# Altium PCB BK Robot.PcbDoc (part 2 of 2)
Units mil, origin at the board's own origin, x right, y up, seen from the top; angles counter-clockwise.
Board outline 3937.01 x 3937.01 mil, 2 copper layers (Top Layer, Bottom Layer); 189 components, 168 nets, 636 pads, 401 vias.
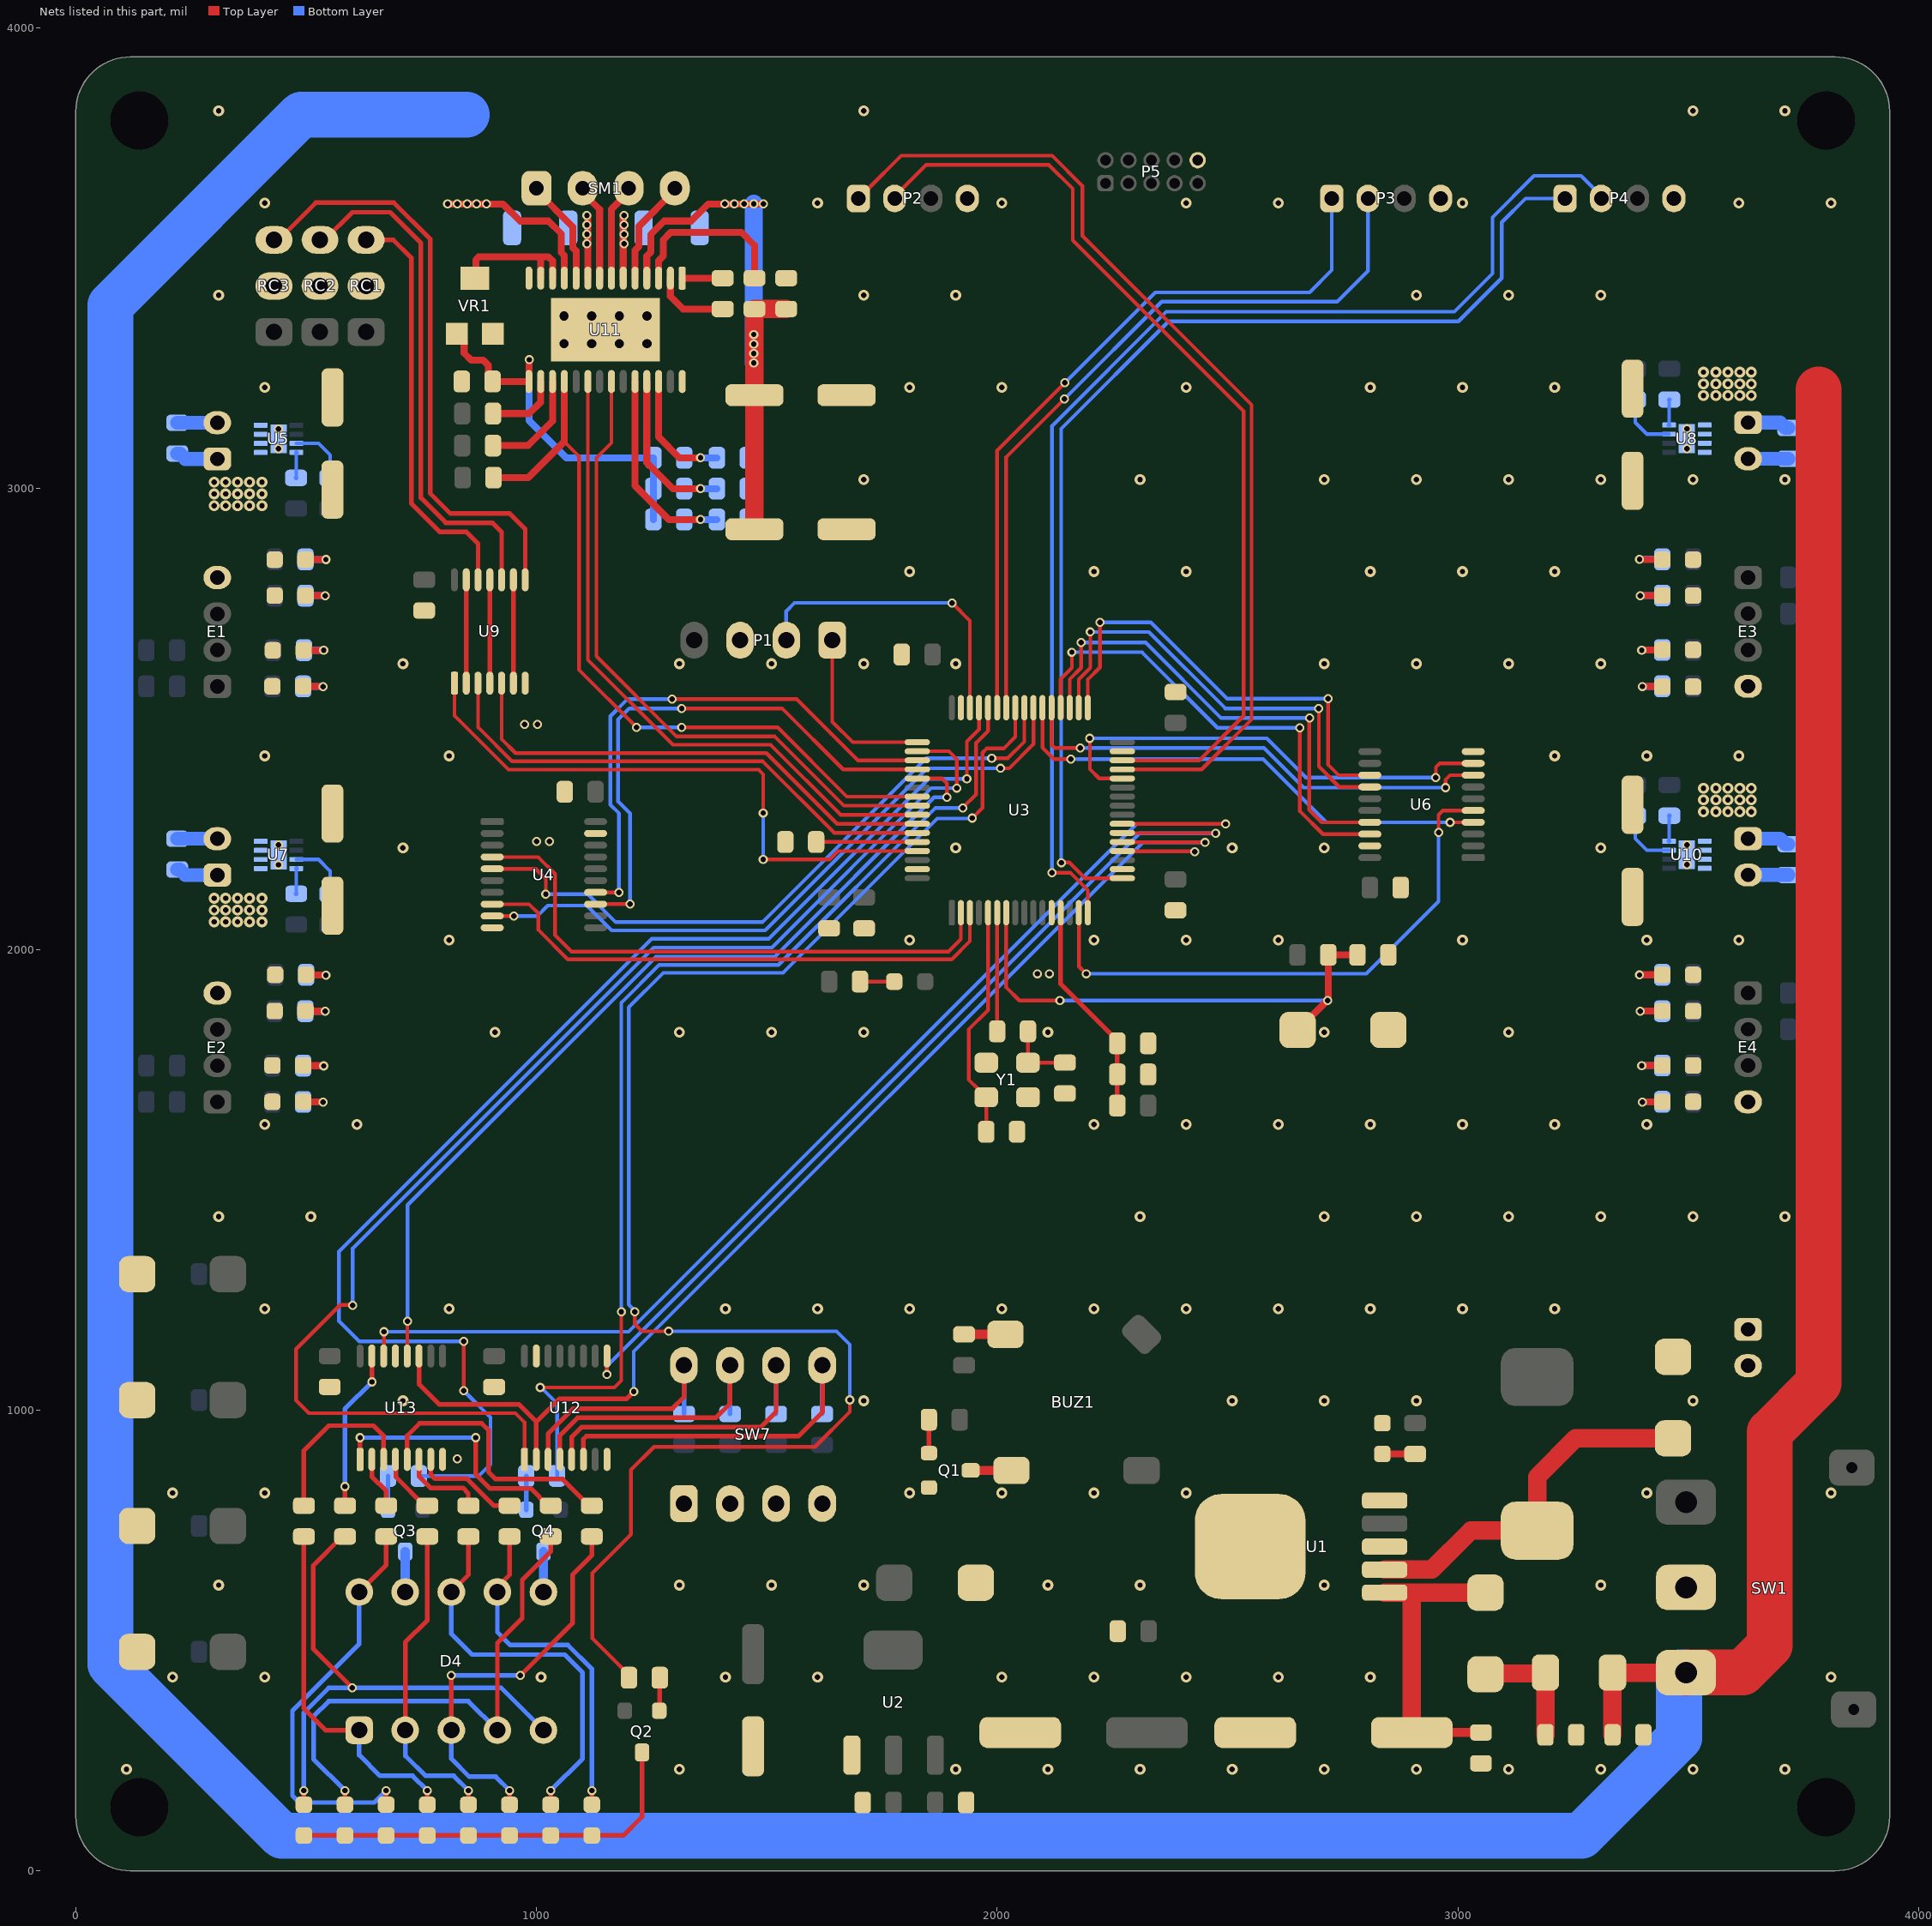
[diagram p2: the nets of this part, all layers, seen from the top]

## Via types
v1: diameter 23.62, hole 11.81, Top Layer to Bottom Layer, tented both sides, 208 vias
v2: diameter 19.68, hole 11.81, Top Layer to Bottom Layer, tented both sides, 167 vias
v3: diameter 19.68, hole 11.81, Top Layer to Bottom Layer, tented bottom, 18 vias
v4: diameter 40, hole 20, Top Layer to Bottom Layer, tented both sides, 8 vias

## Nets (pads, with @x,y where several pads share a name; then routed paths per layer and width w, separated by ;. In a path a pad name is that pad's centre, name@x,y a point inside that pad or via, vN(x,y) a via of type N, cw(c..) or ccw(c..) an arc to the next point about the centre after c; other vN are vias at no path point) (continued)
ENCODER2_A: U3.51 U4.14 | length 1177.8
  Top Layer w8: U4.14@1128.2,2123.61 v2(1178.99,2123.63) ; v2(1294,2543) 1565,2543 1697.73,2410.27 U3.51@1826.5,2410.27
  Bottom Layer w8: v2(1178.99,2123.63) 1178.99,2295.01 1160,2314 1160,2506 1197,2543 v2(1294,2543)
ENCODER2_B: U3.52 U4.13 | length 1198.5
  Top Layer w8: U4.13@1128.2,2098.02 1128.5,2098.32 1200.68,2098.32 v2@1200.99,2098.63 ; v2(1315,2523) 1533,2523 1665.42,2390.58 U3.52@1826.5,2390.58
  Bottom Layer w8: v2(1202.99,2098.63) 1202.99,2295.01 1177,2321 1177,2499 1201,2523 v2(1315,2523)
ENCODER3_A: U3.34 U6.14 | length 984.9
  Top Layer w8: U3.34@2176.95,2524.5 2176.95,2585.95 2202,2611 v2@2202,2685 ; v2@2698,2517 2698,2397 2742.54,2352.46 U6.14@2808.78,2352.46
  Bottom Layer w8: v2(2202,2689) 2329,2689 2495,2523 v2(2698,2523)
ENCODER3_B: U3.33 U6.13 | length 989.5
  Top Layer w8: U3.33@2196.64,2524.5 2196.64,2585.84 2223,2612.2 v2@2223,2706 ; 2718,2534 2718,2401 2740.95,2378.05 U6.13@2808.78,2378.05
  Bottom Layer w8: v2(2223,2710) 2333,2710 2499,2544 v2(2718,2544)
ENCODER4_A: U3.36 U6.18 | length 1047
  Top Layer w8: U3.36@2137.58,2524.5 2137.58,2586.58 2162,2611 v2(2162,2645) ; v2(2657,2481) 2657,2300 2706.9,2250.1 U6.18@2808.78,2250.1
  Bottom Layer w8: v2(2162,2645) 2314,2645 2478,2481 v2(2657,2481)
ENCODER4_B: U3.35 U6.17 | length 1054.2
  Top Layer w8: U3.35@2157.27,2524.5 2157.27,2586.27 2182,2611 v2(2182,2666) ; v2@2678,2498 2677,2497 2677,2303 2704.31,2275.69 U6.17@2808.78,2275.69
  Bottom Layer w8: v2(2182,2666) 2322,2666 2486,2502 v2(2678,2502)
GND: C1.2 C2.2 C3.2 C4.2 C5.2 C6.2 C7.2 C8.2 C9.2 C10.2 C11.2 C12.2 C13.2 C14.2 C15.2 C16.2 C17.2 C18.2 C19.2 C21.2 C22.2 C24.2 C25.2 C27.2 C29.2 C30.2 C32.2 C33.2 C34.1 C36.2 C37.2 C38.2 D2.1 D3.1 E1.4 E2.4 E3.4 E4.4 JP1.1 LED1.2 LED2.2 LED3.2 LED4.2 LED5.2 LED6.2 LED7.2 LED8.2 LED9.2 LED10.2 LED11.2 LED12.2 LED13.2 LED14.2 LED15.2 LED16.2 LED17.2 P1.3 P2.4 P3.4 P4.4 P5.10 Q1.2 R2.1 R39.1 R43.1 R45.1 R46.2 R47.2 RC1.2 RC2.2 RC3.2 SW2.2 SW3.1 SW4.1 SW5.1 SW6.1 SW7.1 SW7.2 SW7.3 SW7.4 U1.3 U1.5 U1.6 U2.1 U3.12 U3.18 U3.31 U3.47 U3.63 U4.10 U4.19 U5.4 U5.9 U5.10 U5.11 U6.10 U6.19 U7.4 U7.9 U7.10 U7.11 U8.4 U8.9 U8.10 U8.11 U9.7 U10.4 U10.9 U10.10 U10.11 U11.14 U11.28 U11.29 U12.8 U12.15 U13.8 U13.13 VR1.3 Y1.2 Y1.4
  other v1: 110,220 1310,220 1910,220 2110,220 2310,220 2510,220 2710,220 2910,220 3110,220 3310,220 3510,220 3710,220 210,420 410,420 1010,420 1410,420 1610,420 2010,420 2210,420 2410,420 2610,420 2810,420 3810,420 310,620 1310,620 1510,620 1710,620 2110,620 2310,620 2710,620 3310,620 210,820 410,820 1810,820 2010,820 2210,820 2410,820 3410,820 3810,820 710,1020 1710,1020 2510,1020 2710,1020 2910,1020 3510,1020 410,1220 810,1220 1410,1220 1610,1220 1810,1220 2010,1220 2210,1220 2410,1220 2610,1220 2810,1220 3010,1220 3210,1220 310,1420 510,1420 2310,1420 2710,1420 2910,1420 3110,1420 3310,1420 3510,1420 3710,1420 410,1620 610,1620 2210,1620 2410,1620 2610,1620 2810,1620 3010,1620 3210,1620 3410,1620 910,1820 1310,1820 1510,1820 1710,1820 2110,1820 2710,1820 3110,1820 810,2020 1810,2020 2210,2020 2410,2020 2610,2020 3010,2020 3410,2020 3610,2020 710,2220 1910,2220 2510,2220 2710,2220 3310,2220 410,2420 810,2420 3210,2420 3410,2420 3610,2420 710,2620 1310,2620 1510,2620 1710,2620 1910,2620 2710,2620 2910,2620 3110,2620 3310,2620 1810,2820 2210,2820 2410,2820 2810,2820 3010,2820 3210,2820 1710,3020 2310,3020 2710,3020 2910,3020 3110,3020 3310,3020 3510,3020 3710,3020 410,3220 1810,3220 2010,3220 2410,3220 2810,3220 3010,3220 3210,3220 310,3420 1710,3420 1910,3420 2910,3420 3110,3420 3310,3420 410,3620 1610,3620 2010,3620 2410,3620 2610,3620 3010,3620 3610,3620 3810,3620 310,3820 1710,3820 3510,3820 3710,3820
  other v2: 828,894 2087,1947 2113,1947 1000,2234 1028,2234 974,2488 1002,2488
  other v4: 1059.75,3314.8 1119.75,3314.8 1179.75,3314.8 1239.75,3314.8 1059.75,3374.8 1119.75,3374.8 1179.75,3374.8 1239.75,3374.8
I2C2_SCL: P2.1 U3.29 | length 2187.7
  Top Layer w8: P2.1@1698.78,3630 1698.78,3630.4 1719.13,3650.75 1719.53,3650.75 1791.78,3723 2119,3723 2185,3657 2185,3549 2552,3182 2552,2499 2443.58,2390.58 U3.29@2271.5,2390.58
I2C2_SDA: P2.2 U3.30 | length 2042.4
  Top Layer w8: P2.2@1777.52,3630 1777.52,3635 1845.52,3703 2112,3703 2164,3651 2164,3539 2535,3168 2535,2507 2438.27,2410.27 U3.30@2271.5,2410.27
INPUT_LOAD: U3.50 U12.1 | length 2874.7
  Top Layer w8: v2(601,1227) 600,1228 573.87,1228 478,1132.13 478,1021 506,993 954.13,993 973.84,973.29 U12.1@973.84,892.8 ; U3.50@1826.5,2429.95 1895.05,2429.95 1912,2413 v2(1912,2350)
  Bottom Layer w8: v2(601,1227) 601,1351 1254,2004 1511,2004 1857,2350 v2(1912,2350)
LED7_A: D4.7 LED19.2 R60.2 | length 751.2
  Top Layer w10: D4.7@915,605 915,615.78 941.43,642.21 R60.2@941.43,725.54 ; LED19.2@1120,143.46 v2(1120,174)
  Bottom Layer w10: D4.7@915,605 915,518 943,490 1068,490 1120,438 v2(1120,174)
LED7_B: D4.8 LED20.2 R61.2 | length 861.8
  Top Layer w10: D4.8@815,605 852.14,642.14 R61.2@852.14,725.54 ; LED20.2@1030.71,143.46 v2(1030.71,174)
  Bottom Layer w10: D4.8@815,605 815,514 860,469 1060.72,469 1100,429.72 1100,243.29 v2(1030.71,174)
LED7_C: D4.3 LED21.2 R64.2 | length 882.3
  Top Layer w10: D4.3@815,305 v2(815,424) ; LED21.2@941.43,143.46 v2(941.43,174) ; v2(965,424) 1078,537 1078,642 1120,684 R64.2@1120,725.54
  Bottom Layer w10: D4.3@815,305 815,243 854,204 911.43,204 v2(941.43,174) ; v2(815,424) v2(965,424)
LED7_D: D4.2 LED22.2 R65.2 | length 695.1
  Top Layer w10: D4.2@715,305 715,496 762.86,543.86 R65.2@762.86,725.54 ; LED22.2@852.14,143.46 v2(852.14,174)
  Bottom Layer w10: D4.2@715,305 715,249 716.14,249 759.14,206 820.14,206 v2(852.14,174)
LED7_E: D4.1 LED23.2 R66.2 | length 777.3
  Top Layer w10: R66.2@495,725.54 495,352 542,305 D4.1@615,305 ; LED23.2@762.86,143.46 v2(762.86,174)
  Bottom Layer w10: D4.1@615,305 615,251 660,206 730.86,206 v2(762.86,174)
LED7_EN1: R62.2 U3.45 | length 2850.5
  Top Layer w8: v2(842,1042) v2(842,1149) ; v2(1934,2370) 1934,2451 1960.42,2477.42 U3.45@1960.42,2524.5
  Bottom Layer w8: R62.2@744.53,857 875,857 900,882 900,984 v2(842,1042) ; v2(842,1149) 615,1149 571,1193 571,1344 1250,2023 1504,2023 1851,2370 v2(1934,2370)
LED7_EN2: R63.2 U3.44 | length 2367.1
  Top Layer w8: v2(1008,1049) 1169,1049 1184,1064 v2(1184,1213) ; v2(1925,2307) 1954,2336 1954,2448 1980.1,2474.1 U3.44@1980.1,2524.5
  Bottom Layer w8: v2(1008,1049) 1010,1049 1044.53,1014.47 R63.2@1044.53,857 ; v2(1184,1213) 1184,1884 1266,1966 1525,1966 1866,2307 v2(1925,2307)
LED7_F: D4.10 LED24.2 R67.2 | length 897.9
  Top Layer w10: D4.10@615,605 673.57,663.57 R67.2@673.57,725.54 ; LED24.2@673.57,143.46 v2(673.57,174)
  Bottom Layer w10: D4.10@615,605 615,492 470,347 470,163 485,148 647.57,148 v2(673.57,174)
LED7_G: D4.4 LED25.2 R68.2 | length 1127.1
  Top Layer w10: LED25.2@584.29,143.46 v2(584.29,174) ; D4.4@915,305 915,494 969,548 969,631 1030.71,692.71 R68.2@1030.71,725.54
  Bottom Layer w10: v2(584.29,174) 516,242.29 516,335 549,368 852,368 D4.4@915,305
LED7_P: D4.5 LED26.2 R69.2 | length 1175.9
  Top Layer w10: LED26.2@495,143.46 v2(495,174) ; R69.2@584.29,725.54 578.38,725.54 515,662.16 515,482 v2(600,397)
  Bottom Layer w10: v2(495,174) 495,343 549,397 v2(600,397) 923,397 D4.5@1015,305
LED_EN: R59.2 U3.41 | length 3586
  Top Layer w8: R59.2@1200.54,419 1200.54,424.91 1121,504.44 1121,646 1205,730 1205,870 1255,920 1604,920 1680,996 v2(1680,1022) ; v2(1213,1213) 1213,1187 1229,1171 v2(1287,1171) ; v2(1946,2285) 1968,2307 1968,2427 1977,2436 2014,2436 2039.16,2461.16 U3.41@2039.16,2524.5
  Bottom Layer w8: v2(1213,1213) 1213,1216.16 1200,1229.16 1200,1874 1275,1949 1535,1949 1870,2284 1945,2284 v2(1946,2285) ; v2(1287,1171) 1651,1171 1680,1142 v2(1680,1022)
LED_LATCH: U3.53 U13.12 | length 1964.9
  Top Layer w8: U13.12@718.96,1116.96 U13.12@719.2,1117.2 719.45,1117.45 v2@719.45,1192.76 ; U3.53@1826.5,2370.9 1880.1,2370.9 1891,2360 v2(1891,2330)
  Bottom Layer w8: v2(719.94,1192.76) 719.94,1444.94 1259,1984 1517,1984 1863,2330 v2(1891,2330)
M1_DIR: U3.2 U4.4 | length 1248.9
  Top Layer w8: U4.4@903.8,2200.39 1003.61,2200.39 1040,2164 1040,2031 1076,1995 1894,1995 1921.05,2022.05 U3.2@1921.05,2079.5
M1_L: C20.2 M1.1 U5.2 | length 91.9
  Bottom Layer w30: C20.2@220,3076.26 225.91,3076.26 237.72,3064.45 M1.1@306.98,3064.45
M1_PWM: U3.40 U4.5 | length 1465.3
  Top Layer w8: U4.5@903.8,2174.8 998.2,2174.8 1020,2153 v2(1020,2120) v2@1020,2113 ; v2(1988,2415) 2023,2415 2058.84,2450.84 U3.40@2058.84,2524.5
  Bottom Layer w8: v2(1020,2120) 1111,2120 1172,2059 1490,2059 1846,2415 v2(1988,2415)
M1_R: C20.1 M1.2 U5.3 | length 87
  Bottom Layer w30: C20.1@220,3143.19 M1.2@306.98,3143.19
M2_DIR: U3.3 U4.8 | length 1186
  Top Layer w8: U4.8@903.8,2098.02 983.98,2098.02 1004,2078 1004,2042 1068,1978 1901,1978 1940.73,2017.73 U3.3@1940.73,2079.5
M2_L: C23.2 M2.1 U7.2 | length 91.9
  Bottom Layer w30: C23.2@220,2173.07 225.91,2173.07 237.72,2161.26 M2.1@306.98,2161.26
M2_PWM: U3.39 U4.9 | length 1453.3
  Top Layer w8: U4.9@903.8,2072.43 904.01,2072.22 950.78,2072.22 v2(951,2072) ; v2(2007,2393) 2026,2393 2078.53,2445.53 U3.39@2078.53,2524.5
  Bottom Layer w8: v2(951,2072) 1001.2,2072 1024.2,2095 1109,2095 1163,2041 1496,2041 1848,2393 v2(2007,2393)
M2_R: C23.1 M2.2 U7.3 | length 87
  Bottom Layer w30: C23.1@220,2240 M2.2@306.98,2240
M3_DIR: U3.28 U6.9 | length 1038.8
  Top Layer w8: v2(2201,2458) 2201,2391 2221.1,2370.9 U3.28@2271.5,2370.9 ; v2(2952,2373) 2952.44,2373.44 2952.44,2395.44 2960.65,2403.65 U6.9@3033.19,2403.65
  Bottom Layer w8: v2(2201,2458) 2585,2458 2670,2373 v2(2952,2373)
M3_L: C26.2 M3.1 U8.2 | length 91.9
  Bottom Layer w30: M3.1@3630,3143.49 3699.26,3143.49 3711.08,3131.68 C26.2@3716.98,3131.68
M3_PWM: U3.37 U6.8 | length 1042.4
  Top Layer w8: U3.37@2117.9,2524.5 2117.9,2444.1 2125,2437 v2(2180,2437) ; v2(2973,2351) 2973,2368 2983.03,2378.03 U6.8@3033.16,2378.03
  Bottom Layer w8: 2193,2437 2579,2437 2665,2351 v2(2973,2351)
M3_R: C26.1 M3.2 U8.3 | length 87
  Bottom Layer w30: M3.2@3630,3064.75 C26.1@3716.98,3064.75
M4_DIR: U3.15 U6.5 | length 1238.4
  Top Layer w8: U3.15@2176.95,2079.5 2177.48,2078.97 2177.48,1962.52 v2(2193,1947) ; v2(2958,2254) 2958,2292 2967.28,2301.28 U6.5@3033.19,2301.28 U6.5@3033.33,2301.14
  Bottom Layer w8: v2(2193,1947) 2801,1947 2958,2104 v2(2958,2254) v2@2958,2256
M4_L: C28.2 M4.1 U10.2 | length 91.9
  Bottom Layer w30: M4.1@3630,2240.3 3699.26,2240.3 3711.08,2228.49 C28.2@3716.98,2228.49
M4_PWM: U3.38 U6.4 | length 1075.8
  Top Layer w8: U3.38@2098.21,2524.5 2098.21,2437.79 2123,2413 v2(2160,2413) ; v2@2983.03,2275.67 U6.4@3033.19,2275.69
  Bottom Layer w8: 2173,2413 2577,2413 2714.36,2275.64 v2(2983,2275.64)
M4_R: C28.1 M4.2 U10.3 | length 87
  Bottom Layer w30: M4.2@3630,2161.56 C28.1@3716.98,2161.56
NetBUZ1_1: BUZ1.1 R48.1 | length 90
  Top Layer w20: R48.1@1928,1164.28 BUZ1.1@2018,1164.28
NetBUZ1_2: BUZ1.2 Q1.3 | length 88.7
  Top Layer w20: Q1.3@1942.28,869 BUZ1.2@2031,869
NetC2_1: C2.1 D1.1 L1.2 | length 266.4
  Top Layer w40: D1.1@3060,426.42 3061.75,428.17 3188.25,428.17 L1.2@3190,429.92 C2.1@3190,295
NetC3_1: C3.1 C4.1 D1.2 U1.1 | length 673.5
  Top Layer w20: C3.1@2900,300 C4.1@3050,300
  Top Layer w40: U1.1@2840.89,603.58 2898,603.58 ; C3.1@2900,300 2900,601.58 2898,603.58 ; D1.2@3060,603.58 2898,603.58
NetC10_1: C10.1 R3.1 Y1.1 | length 148.3
  Top Layer w8: R3.1@2066.72,1822 Y1.1@2066.72,1754 C10.1@2147,1754
NetC11_1: C11.1 U3.5 Y1.3 | length 508.9
  Top Layer w8: C11.1@1976.17,1604 Y1.3@1976.17,1679.2 1975.92,1679.2 1958.79,1696.33 1958.79,1696.57 1938,1717.36 1938,1826 1980.1,1868.1 U3.5@1980.1,2079.5
NetC12_1: C12.1 R4.2 SW2.1 U3.7 | length 1125.4
  Top Layer w8: U3.7@2019.47,2079.5 2019.47,1917.53 2048,1889 v2(2136,1889)
  Top Layer w15: SW2.1@2652.15,1825 2718.46,1891.32 R4.2@2718.46,1988 C12.1@2782.07,1988
  Bottom Layer w8: v2(2136,1889) v2(2717,1889)
NetC18_1: C18.1 C19.1 L3.1 U3.13 | length 469.4
  Top Layer w10: U3.13@2137.58,2079.5 2137.58,1924.86 2260.54,1801.91 C18.1@2260.54,1796 C19.1@2260.54,1728.5 L3.1@2260.54,1661
NetC31_1: C31.1 U11.2 | length 164.4
  Top Layer w15: U11.2@1290.5,3457 1290.5,3417.5 1317.93,3390.07 C31.1@1404,3390.07
NetC31_2: C31.2 U11.1 | length 87.9
  Top Layer w15: U11.1@1316.09,3457 C31.2@1404,3457
NetC35_2: C35.2 U11.3 | length 374.4
  Top Layer w15: U11.3@1264.91,3457 1264.91,3495.1 1275,3505.19 1275,3540 1291,3556 1445,3556 1473,3528 C35.2@1473,3457
NetD2_2: D2.2 L2.1 U1.2 | length 812.5
  Top Layer w40: U1.2@2840.89,653.58 2943.58,653.58 3028.15,738.15 L2.1@3172,738.15 3172,855 3255.42,938.42 D2.2@3467,938.42
NetD4_6: D4.6 Q4.3 | length 87.7
  Bottom Layer w20: D4.6@1015,605 Q4.3@1015,692.72
NetD4_9: D4.9 Q3.3 | length 87.7
  Bottom Layer w20: D4.9@715,605 Q3.3@715,692.72
NetJP1_2: JP1.2 SW1.2
NetLED1_1: LED1.1 R1.1 | length 71
  Top Layer w15: LED1.1@2836,904.54 R1.1@2907,904.54
NetLED2_1: LED2.1 R11.1 | length 87.5
  Top Layer w15: LED2.1@498.46,2846 498.52,2846.06 v2(542.74,2846.12) v2(542.74,2846.12)
  Bottom Layer w15: R11.1@499.74,2846.64 500,2846.38 542.48,2846.38 v2(542.74,2846.12)
NetLED3_1: LED3.1 R12.1 | length 86.2
  Top Layer w15: LED3.1@498.46,2768 498.78,2767.69 540.89,2767.69 v2(541.2,2767.38)
  Bottom Layer w15: R12.1@498.2,2767.9 R12.1@498.46,2767.64 540.94,2767.64 v2(541.2,2767.38)
NetLED4_1: LED4.1 R13.1 | length 86.8
  Top Layer w15: LED4.1@494.46,2649 v2(538,2649)
  Bottom Layer w15: R13.1@495,2649.52 495.26,2649.26 537.74,2649.26 v2(538,2649)
NetLED5_1: LED5.1 R14.1 | length 86.5
  Top Layer w15: LED5.1@493.46,2571 493.83,2570.63 536.09,2570.63 v2(536.46,2570.26)
  Bottom Layer w15: R14.1@493.46,2570.78 493.72,2570.52 536.2,2570.52 v2(536.46,2570.26)
NetLED6_1: LED6.1 R20.1 | length 86.9
  Top Layer w15: LED6.1@499.46,1945 499.91,1944.56 542.3,1944.56 v2(542.74,1944.12)
  Bottom Layer w15: R20.1@499.74,1944.64 500,1944.38 542.48,1944.38 v2(542.74,1944.12)
NetLED7_1: LED7.1 R21.1 | length 86.2
  Top Layer w15: LED7.1@498.46,1866 498.78,1865.69 540.89,1865.69 v2(541.2,1865.38)
  Bottom Layer w15: R21.1@498.2,1865.9 498.46,1865.64 540.94,1865.64 v2(541.2,1865.38)
NetLED8_1: LED8.1 R23.1 | length 88.2
  Top Layer w15: LED8.1@493.46,1748 493.96,1747.5 537.5,1747.5 v2(538,1747)
  Bottom Layer w15: R23.1@495,1747.52 495.26,1747.26 537.74,1747.26 v2(538,1747)
NetLED9_1: LED9.1 R24.1 | length 86.5
  Top Layer w15: LED9.1@493.46,1669 493.83,1668.63 536.09,1668.63 v2(536.46,1668.26)
  Bottom Layer w15: R24.1@493.46,1668.78 493.72,1668.52 536.2,1668.52 v2(536.46,1668.26)
NetLED10_1: LED10.1 R27.1 | length 92.7
  Top Layer w15: v2(3394.24,2846.42) 3394.45,2846.21 3443.33,2846.21 LED10.1@3443.54,2846
  Bottom Layer w15: v2(3394.24,2846.42) 3394.5,2846.68 3436.98,2846.68 R27.1@3437.24,2846.94
NetLED11_1: LED11.1 R28.1 | length 91.1
  Top Layer w15: v2(3395.78,2767.68) 3395.94,2767.84 3443.37,2767.84 LED11.1@3443.54,2768
  Bottom Layer w15: v2(3395.78,2767.68) 3396.04,2767.94 3438.52,2767.94 R28.1@3438.78,2768.2
NetLED12_1: LED12.1 R29.1 | length 88.1
  Top Layer w15: v2(3398.98,2649.3) 3399.33,2649.65 3443.19,2649.65 LED12.1@3443.54,2650
  Bottom Layer w15: v2(3398.98,2649.3) 3399.24,2649.56 3441.72,2649.56 R29.1@3441.98,2649.82
NetLED13_1: LED13.1 R30.1 | length 86.5
  Top Layer w15: v2(3400.52,2570.56) 3400.8,2570.28 3443.26,2570.28 LED13.1@3443.54,2570
  Bottom Layer w15: v2(3400.52,2570.56) 3400.78,2570.82 3443.26,2570.82 R30.1@3443.52,2571.08
NetLED14_1: LED14.1 R33.1 | length 92.8
  Top Layer w15: v2(3394.24,1944.42) 3394.53,1944.71 3443.24,1944.71 LED14.1@3443.54,1945
  Bottom Layer w15: v2(3394.24,1944.42) 3394.5,1944.68 3436.98,1944.68 R33.1@3437.24,1944.94
NetLED15_1: LED15.1 R34.1 | length 91.1
  Top Layer w15: v2(3395.78,1865.68) 3395.94,1865.84 3443.37,1865.84 LED15.1@3443.54,1866
  Bottom Layer w15: v2(3395.78,1865.68) 3396.04,1865.94 3438.52,1865.94 R34.1@3438.78,1866.2
NetLED16_1: LED16.1 R35.1 | length 88.1
  Top Layer w15: v2(3398.98,1747.3) 3399.33,1747.65 3443.19,1747.65 LED16.1@3443.54,1748
  Bottom Layer w15: v2(3398.98,1747.3) 3399.24,1747.56 3441.72,1747.56 R35.1@3441.98,1747.82
NetLED17_1: LED17.1 R36.1 | length 86.4
  Top Layer w15: v2(3400.52,1668.56) 3400.74,1668.78 3443.31,1668.78 LED17.1@3443.54,1669
  Bottom Layer w15: v2(3400.52,1668.56) 3400.78,1668.82 3443.26,1668.82 R36.1@3443.54,1669.08
NetLED18_1: LED18.1 R58.1 | length 74.6
  Top Layer w8: R58.1@1701.93,1930 LED18.1@1776.54,1930
NetLED19_1: LED19.1 LED20.1 LED21.1 LED22.1 LED23.1 LED24.1 LED25.1 LED26.1 Q2.3 | length 890.5
  Top Layer w10: LED26.1@495,76.54 LED25.1@584.29,76.54 LED24.1@673.57,76.54 LED23.1@762.86,76.54 LED22.1@852.14,76.54 LED21.1@941.43,76.54 LED20.1@1030.71,76.54 LED19.1@1120,76.54 1188.54,76.54 1229,117 Q2.3@1229,256.72
NetQ1_1: Q1.1 R55.2 | length 72.6
  Top Layer w10: Q1.1@1851.72,906.4 R55.2@1851.72,979
NetQ2_1: Q2.1 R59.1 | length 72.2
  Top Layer w10: Q2.1@1266.4,347.28 1266.93,347.81 1266.93,418.47 R59.1@1267.46,419
NetQ3_1: Q3.1 R62.1 | length 73.7
  Bottom Layer w10: Q3.1@677.6,783.28 R62.1@677.6,857
NetQ4_1: Q4.1 R63.1 | length 73.7
  Bottom Layer w10: Q4.1@977.6,783.28 R63.1@977.6,857
NetR2_2: R2.2 U3.60 | length 219.6
  Top Layer w8: R2.2@1606.93,2233.1 U3.60@1826.5,2233.1
NetR3_2: R3.2 U3.6 | length 257.5
  Top Layer w8: R3.2@1999.79,1822 U3.6@1999.79,2079.5
NetR5_1: R5.1 U5.7 | length 133.3
  Bottom Layer w8: U5.7@478.78,3098.35 526.65,3098.35 552,3073 R5.1@552,3023.46
NetR6_1: R6.1 U5.8 | length 55.5
  Bottom Layer w8: R6.1@478.39,3023.85 U5.8@478.39,3078.28
  Bottom Layer w10: R6.1@478,3023.46 R6.1@478.39,3023.85 ; U5.8@478.39,3078.28 U5.8@478.78,3078.67
NetR15_1: R15.1 U7.7 | length 133.3
  Bottom Layer w8: U7.7@478.78,2195.16 526.65,2195.16 552,2169.81 R15.1@552,2120.27
NetR16_1: R16.1 U7.8 | length 55.5
  Bottom Layer w8: R16.1@478.39,2120.66 U7.8@478.39,2175.08
  Bottom Layer w10: R16.1@478,2120.27 R16.1@478.39,2120.66 ; U7.8@478.39,2175.08 U7.8@478.78,2175.47
NetR25_1: R25.1 U8.7 | length 133.3
  Bottom Layer w8: R25.1@3384.98,3193.22 3384.98,3143.68 3410.33,3118.33 U8.7@3458.2,3118.33
NetR26_1: R26.1 U8.8 | length 55.5
  Bottom Layer w8: U8.8@3458.59,3138.41 R26.1@3458.59,3192.83
  Bottom Layer w10: U8.8@3458.2,3138.02 U8.8@3458.59,3138.41 ; R26.1@3458.59,3192.83 R26.1@3458.98,3193.22
NetR31_1: R31.1 U10.7 | length 133.3
  Bottom Layer w8: R31.1@3384.98,2290.03 3384.98,2240.49 3410.33,2215.14 U10.7@3458.2,2215.14
NetR32_1: R32.1 U10.8 | length 55.5
  Bottom Layer w8: U10.8@3458.59,2235.22 R32.1@3458.59,2289.64
  Bottom Layer w10: U10.8@3458.2,2234.83 U10.8@3458.59,2235.22 ; R32.1@3458.59,2289.64 R32.1@3458.98,2290.03
NetR38_2: R38.2 U11.17 | length 237.1
  Top Layer w15: R38.2@905.46,3093.53 981.53,3093.53 1034.59,3146.59 U11.17@1034.59,3232.59
NetR40_2: R40.2 U11.16 | length 158.5
  Top Layer w15: R40.2@905.46,3163.06 984.06,3163.06 1009,3188 U11.16@1009,3232.59
NetR46_1: R46.1 U11.9 | length 136.1
  Top Layer w15: U11.9@1111.36,3457 1111.36,3552 v3@1111.36,3593.09
  other v3: 1109.36,3531.45 1109.36,3552 1109.36,3572.55 1109.36,3593.09
NetR47_1: R47.1 U11.6 | length 136.1
  Top Layer w15: U11.6@1188.13,3457 v3@1188.13,3593.09
  other v3: 1190.13,3531.45 1190.13,3552 1190.13,3572.55 1190.13,3593.09
NetR60_1: R60.1 U13.7 | length 231.8
  Top Layer w10: U13.7@770.39,892.8 770.39,860 779.4,850.99 849.01,850.99 907.54,792.46 R60.1@941.43,792.46
NetR61_1: R61.1 U13.6 | length 185.8
  Top Layer w10: U13.6@744.8,892.8 744.8,856.2 770.01,830.99 840.08,830.99 851.74,819.32 851.74,792.86 R61.1@852.14,792.46
NetR64_1: R64.1 U13.5 | length 590.6
  Top Layer w10: U13.5@719.2,892.8 719.2,944.2 746,971 881,971 896,956 896,865 911,850 1056.56,850 1114.09,792.46 R64.1@1120,792.46
NetR65_1: R65.1 U13.4 | length 132.5
  Top Layer w10: U13.4@693.61,892.8 694.57,891.84 694.57,854.85 756.95,792.46 R65.1@762.86,792.46
NetR66_1: R66.1 U13.3 | length 375.2
  Top Layer w10: R66.1@495,792.46 495,912 549,966 646,966 668.02,943.98 U13.3@668.02,892.8
NetR67_1: R67.1 U13.2 | length 113.2
  Top Layer w10: U13.2@642.43,892.8 642.43,855.57 673.57,824.43 R67.1@673.57,792.46
NetR68_1: R68.1 U13.1 | length 566.8
  Top Layer w10: U13.1@616.84,892.8 616.92,892.87 616.92,939.92 v2(617,940) ; v2@868,938 868,860.28 898.28,830 987.27,830 1024.81,792.46 R68.1@1030.71,792.46
  Bottom Layer w10: v2(617,940) v2(868,940)
NetR69_1: R69.1 U13.15 | length 349.5
  Top Layer w10: v2(584,834) 584.14,833.86 584.14,792.61 R69.1@584.29,792.46 ; U13.15@642.43,1117.2 642.72,1116.92 642.72,1061.28 v2(643,1061)
  Bottom Layer w10: v2(584,834) 584,1002 v2(643,1061)
NetRC1_3: RC1.3 U9.12 | length 907
  Top Layer w10: RC1.3@630,3540 689,3540 728,3501 728,2968 790,2906 848,2906 873.02,2880.98 U9.12@873.02,2802.2
NetRC2_3: RC2.3 U9.10 | length 1134.1
  Top Layer w10: RC2.3@530,3540 540,3540 600,3600 682,3600 749,3533 749,2980 803,2926 904,2926 924.2,2905.8 U9.10@924.2,2802.2
NetRC3_3: RC3.3 U9.8 | length 1306.1
  Top Layer w10: RC3.3@430,3540 440,3540 521,3621 690,3621 769,3542 769,2990 813,2946 942,2946 975.39,2912.61 U9.8@975.39,2802.2
NetSM1_1: SM1.1 U11.10 | length 230.5
  Top Layer w15: SM1.1@1000,3652 1000,3647 1079,3568 1079,3523 1085.77,3516.23 U11.10@1085.77,3457
NetSM1_2: SM1.2 U11.8 | length 210.3
  Top Layer w15: SM1.2@1100,3652 1100,3643.12 1136.95,3606.17 U11.8@1136.95,3457
NetSM1_3: SM1.3 U11.7 | length 210.5
  Top Layer w15: U11.7@1162.54,3457 1162.54,3606.68 1200,3644.13 SM1.3@1200,3652
NetSM1_4: SM1.4 U11.5 | length 230.5
  Top Layer w15: U11.5@1213.72,3457 1213.72,3517.04 1222,3525.31 1222,3569.5 1299.5,3647 SM1.4@1299.5,3652
NetU9_2: U9.2 U9.13 | length 224.4
  Top Layer w10: U9.2@847.43,2577.8 U9.13@847.43,2802.2
NetU9_4: U9.4 U9.11 | length 224.4
  Top Layer w10: U9.4@898.61,2577.8 U9.11@898.61,2802.2
NetU9_6: U9.6 U9.9 | length 224.4
  Top Layer w10: U9.6@949.8,2577.8 U9.9@949.8,2802.2
NetU11_12: U11.12 U11.13 VR1.2 | length 298.9
  Top Layer w15: VR1.2@866,3457 868,3459 868,3497 874.38,3503.38 1013.38,3503.38 ; 1008,3498 1013.38,3503.38 ; U11.13@1009,3457 1009,3497 ; U11.12@1034.59,3457 1034.59,3494.59 1025.8,3503.38 1013.38,3503.38
RC_SERVO_1: U3.61 U9.1 | length 1320.6
  Top Layer w8: U9.1@821.84,2577.8 821.84,2507.16 939,2390 1482,2390 1492,2380 v2(1492,2296) ; v2(1492,2195) 1636,2195 1654.42,2213.42 U3.61@1826.5,2213.42
  Bottom Layer w8: v2(1492,2195) v2(1492,2296)
RC_SERVO_2: U3.59 U9.3 | length 1144.2
  Top Layer w8: U9.3@873.02,2577.8 873.02,2481.98 947,2408 1491,2408 1646.21,2252.79 U3.59@1826.5,2252.79
RC_SERVO_3: U3.58 U9.5 | length 1100
  Top Layer w8: U9.5@924.2,2577.8 924.2,2456.25 954.46,2426 1499,2426 1652.53,2272.47 U3.58@1826.5,2272.47
SM_DIR: U3.57 U11.20 | length 1458.5
  Top Layer w8: U11.20@1111.36,3232.59 1111.36,2628.64 1296,2444 1508,2444 1659.84,2292.16 U3.57@1826.5,2292.16
SM_FAULT: R42.1 U3.55 U11.18 | length 1673.5
  Top Layer w8: 1060.18,3102.18 1092,3070.36 1092,2607 v2(1217,2482) ; v2(1315,2482) 1523,2482 1673.47,2331.53 U3.55@1826.5,2331.53
  Top Layer w15: R42.1@906.46,3024 982,3024 1060.18,3102.18 U11.18@1060.18,3232.59
  Bottom Layer w8: v2(1217,2482) v2(1315,2482)
SM_MODE0: R44.2 R45.2 U11.24 | length 470
  Top Layer w15: U11.24@1213.72,3232.59 1213.72,3006.28 1287,2933 v2(1356,2933)
  Bottom Layer w15: R44.2@1320.46,2933 v2(1356,2933) R45.2@1391.54,2933
SM_MODE1: R41.2 R43.2 U11.25 | length 387.1
  Top Layer w15: U11.25@1239.31,3232.59 1239.31,3056.69 1296,3000 v2(1356,3000)
  Bottom Layer w15: R41.2@1320.46,3000 v2(1356,3000) R43.2@1391.54,3000
SM_MODE2: R37.2 R39.2 U11.26 | length 301.3
  Top Layer w15: U11.26@1264.91,3232.59 1264.91,3112.09 1310,3067 v2(1356,3067)
  Bottom Layer w15: R37.2@1320.46,3067 v2(1356,3067) R39.2@1391.54,3067
SM_STEP: U3.56 U11.22 | length 1440.7
  Top Layer w8: U11.22@1162.54,3232.59 1162.54,3099.54 1130,3067 1130,2636.24 1304.24,2462 1517,2462 1667.16,2311.84 U3.56@1826.5,2311.84
SPI1_CS: U3.20 | length 158.1
  Top Layer w8: U3.20@2271.5,2213.42 2272.21,2212.71 2428.29,2212.71 v2(2429,2212)
SPI1_MISO: U3.22 U12.9 | length 2062.6
  Top Layer w8: U12.9@1152.73,1116.96 U12.9@1152.98,1117.2 ; v2(1153,1077) U12.9@1152.98,1117.2 ; U12.9@1153.22,1117.45 U12.9@1152.98,1117.2 ; U3.22@2271.5,2252.79 2271.9,2252.39 2473.61,2252.39 v2(2474,2252)
  Bottom Layer w8: v2(1153,1077) 1153,1096 2309,2252 v2(2474,2252)
SPI1_MOSI: U3.23 U13.14 | length 2561.4
  Top Layer w8: U13.14@668.02,1117.2 668.51,1117.69 668.51,1169.51 v2(669,1170) ; U3.23@2271.5,2272.47 2495.53,2272.47 v2(2496,2272)
  Bottom Layer w8: v2(669,1170) 1199.7,1170 1221.7,1192 1222,1192 2302,2272 v2(2496,2272)
SPI1_SCK: U3.21 U12.2 U13.11 | length 2634.6
  Top Layer w8: U3.21@2271.5,2233.1 2272.06,2232.55 2450.45,2232.55 v2(2451,2232)
  Top Layer w10: U13.11@744.8,1117.2 744.8,1056.2 789,1012 962,1012 999.43,974.57 ; U12.2@999.43,892.8 999.43,974.57 ; v2(1211,1040) 1195,1024 1048.87,1024 999.43,974.57
  Bottom Layer w8: v2(1211,1040) 1211,1127 2316,2232 v2(2451,2232)
SWCLK: P1.1 U3.49 | length 379.9
  Top Layer w8: P1.1@1642,2671 1642,2494 1686.36,2449.64 U3.49@1826.5,2449.64
SWDIO: P1.2 U3.46 | length 674
  Top Layer w8: v2(1902,2752) 1940.73,2713.27 U3.46@1940.73,2524.5
  Bottom Layer w8: P1.2@1542,2671 1542,2734 1560,2752 v2(1902,2752)
SWITCH_1: R53.2 SW7.8 U12.3 | length 557.9
  Top Layer w10: U12.3@1025.02,892.8 1025.02,948.02 1080,1003 1295,1003 1320,1028 SW7.8@1320,1097
  Bottom Layer w10: R53.2@1320,991.46 SW7.8@1320,1097
SWITCH_2: R54.2 SW7.7 U12.4 | length 638.5
  Top Layer w10: U12.4@1050.61,892.8 1050.61,944.61 1089,983 1389,983 1420,1014 SW7.7@1420,1097
  Bottom Layer w10: R54.2@1420,991.46 SW7.7@1420,1097
SWITCH_3: R56.2 SW7.6 U12.5 | length 721.4
  Top Layer w10: U12.5@1076.2,892.8 1076.2,941.2 1098,963 1487,963 1520,996 SW7.6@1520,1097
  Bottom Layer w10: R56.2@1520,991.46 SW7.6@1520,1097
SWITCH_4: R57.2 SW7.5 U12.6 | length 794.7
  Top Layer w10: U12.6@1101.8,892.8 1101.8,936.8 1108,943 1568,943 1621,996 1621,1096 SW7.5@1620,1097
  Bottom Layer w10: R57.2@1620,991.46 SW7.5@1620,1097
USART1_RX: P3.1 U3.43 | length 1602.6
  Top Layer w8: U3.43@1999.79,2524.5 1999.79,3082.79 v2(2147,3230)
  Bottom Layer w8: v2(2147,3230) 2343,3426 2678,3426 2726.26,3474.26 P3.1@2726.26,3630
USART1_TX: P3.2 U3.42 | length 1654.1
  Top Layer w8: U3.42@2019.47,2524.5 2019.47,3068.47 v2(2146,3195)
  Bottom Layer w8: v2(2146,3195) 2357,3406 2738,3406 2805,3473 P3.2@2805,3630
USART2_RX: P4.1 U3.17 | length 2459.6
  Top Layer w8: v2@2139.58,2188.58 2156.22,2188.58 2190.44,2154.36 U3.17@2271.5,2154.36
  Bottom Layer w8: v2(2139,2188) 2139,3130 2372,3363 3001,3363 3095,3457 3095,3578 3147,3630 P4.1@3232.52,3630
USART2_TX: P4.2 U3.16 | length 2624
  Top Layer w8: v2(2119,2166) 2159,2166 2196.64,2128.36 U3.16@2196.64,2079.5
  Bottom Layer w8: v2(2119,2166) 2119,3136 2367,3384 2992,3384 3075,3467 3075,3589 3165,3679 3267.26,3679 3311.26,3635 P4.2@3311.26,3630
V3P3OUT: C36.1 R37.1 R41.1 R44.1 U11.15 VR1.1 | length 846.6
  Top Layer w15: VR1.1@826.63,3336.05 842.75,3319.93 842.75,3294.25 858,3279 884,3279 895.09,3267.91 895.09,3241.97 C36.1@904.46,3232.59 U11.15@983.41,3232.59 983.41,3279.41 v2(984,3280)
  Bottom Layer w15: v2(984,3280) 984,3148 1065,3067 R37.1@1253.54,3067 R41.1@1253.54,3000 R44.1@1253.54,2933
VM: C1.1 C22.1 C25.1 C27.1 C29.1 C32.1 C33.1 C34.2 C35.1 L1.1 SW1.3 U5.1 U7.1 U8.1 U10.1 U11.4 U11.11 | length 12603.3
  Top Layer w15: v3(807,3618) v3(828,3618) v3(849,3618) v3(870,3618) v3(891,3618) 927,3618 964,3581 1026,3581 1054,3553 1054,3512.22 1060.18,3506.04 U11.11@1060.18,3457 ; U11.4@1239.31,3457 1239.31,3504.86 1248,3513.55 1248,3552 1277,3581 1335.5,3581 1372.5,3618 v3(1408.5,3618) v3(1429.5,3618) v3(1450.5,3618) v3(1471.5,3618) v3(1492.5,3618)
  Top Layer w40: C33.1@1473,2912 C32.1@1473,3203 C35.1@1473,3390.07 C34.2@1542,3390.07 ; C1.1@3335.67,295 L1.1@3335.67,429.92 SW1.3@3495,429.92
  Top Layer w100: SW1.3@3495,429.92 3495.79,430.71 3618.42,430.71 3677,489.29 3677,952 3783,1058 3783,3215
  Bottom Layer w40: v2(1471.5,3273) v2(1471.5,3293.55) v2(1471.5,3314.09) v2(1471.5,3334.64) v3(1471.5,3618)
  Bottom Layer w100: 848,3812 489,3812 75,3398 75,448 447,76 3268,76 3480.04,288.04 3480.04,429.13 3480.83,429.92 SW1.3@3495,429.92
  other v1: 300,2059.81 325,2059.81 351,2059.81 377,2059.81 404,2059.81 300,2085.31 325,2085.31 351,2085.31 377,2085.31 404,2085.31 300,2110.81 325,2110.81 351,2110.81 377,2110.81 404,2110.81 3532.98,2298.75 3559.98,2298.75 3585.98,2298.75 3611.98,2298.75 3636.98,2298.75 3532.98,2324.25 3559.98,2324.25 3585.98,2324.25 3611.98,2324.25 3636.98,2324.25 3532.98,2349.75 3559.98,2349.75 3585.98,2349.75 3611.98,2349.75 3636.98,2349.75 300,2963 325,2963 351,2963 377,2963 404,2963 300,2988.5 325,2988.5 351,2988.5 377,2988.5 404,2988.5 300,3014 325,3014 351,3014 377,3014 404,3014 3532.98,3201.94 3559.98,3201.94 3585.98,3201.94 3611.98,3201.94 3636.98,3201.94 3532.98,3227.44 3559.98,3227.44 3585.98,3227.44 3611.98,3227.44 3636.98,3227.44 3532.98,3252.94 3559.98,3252.94 3585.98,3252.94 3611.98,3252.94 3636.98,3252.94
pads on no net: BUZ1.3 BUZ1.4 Hole1.1 Hole2.1 Hole3.1 Hole4.1 SW1.0 SW1.1 U11.19 U11.21 U11.23 U11.27 U12.7 U12.10 U13.9

## Polygon pours and split planes (outlines as drawn)
GND on Bottom Layer "GND_L02_P001" (solid, pour order 1): 1,0 3937,0 3937,3937 0,3937 0,2042
GND on Top Layer "GND_L01_P000" (solid, pour order 0): 0,-1 0,3937 3937,3937 3937,0 3654,0

## Keep-outs
Keep-Out Layer:
  the board outline again, w10

## Other copper
Top Layer:
  region net VM: 3832.8,3189.94 3355.98,3189.94 3355.98,3264.79 3832.8,3264.79
  region net VM: 3800,2286.75 3355.98,2286.75 3355.98,2361.6 3800,2361.6
  region net VM: 288,2122.81 581,2122.81 581,2047.96 288,2047.96 288,2083.81
  region net VM: 288,3026 581,3026 581,2951.16 288,2951.16 288,2987
Bottom Layer:
  region net NetJP1_2: 3585,1121 3585,716 3366,716 3366,513 3779,513 3779,1121
  region net VM: 782,3591 782,3879 1521,3879 1521,3597 1399,3597 1399,3756 901,3756 901,3592
  region net NetR47_1: 1180.5,3603 1180.5,3522 1255,3522 1255,3603
  region net NetR46_1: 1119,3603 1119,3522 1050,3522 1050,3603
  region net VM: 3550.98,2228.35 3520.98,2228.35 3520.98,2361.75 3648.98,2361.75 3648.98,2286.75 3550.98,2286.75
  region net M3_L: 3520.98,3125.49 3556.98,3125.49 3556.98,3174.49 3663.98,3174.49 3663.98,3111.49 3520.88,3111.49
  region net VM: 3550.98,3131.54 3520.98,3131.54 3520.98,3264.94 3648.98,3264.94 3648.98,3189.94 3550.98,3189.94
  region net VM: 386,2181.21 416,2181.21 416,2047.81 77,2047.81 77,2122.81 386,2122.81
  region net VM: 386,3084.41 416,3084.41 416,2951 79,2951 79,3026 386,3026
  region net M4_R: 3520.98,2188.3 3556.98,2188.3 3556.98,2136.3 3663.98,2136.3 3663.98,2202.3 3520.88,2202.3
  region net M4_L: 3520.98,2222.3 3556.98,2222.3 3556.98,2271.3 3663.98,2271.3 3663.98,2208.3 3520.88,2208.3
  region net M3_R: 3520.98,3091.49 3556.98,3091.49 3556.98,3039.49 3663.98,3039.49 3663.98,3105.49 3520.88,3105.49
  region net M1_R: 416,3125.19 380,3125.19 380,3174.19 273,3174.19 273,3111.19 416.1,3111.19
  region net M1_L: 416,3091.19 380,3091.19 380,3039.19 273,3039.19 273,3105.19 416.1,3105.19
  region net M2_L: 416,2188 380,2188 380,2136 273,2136 273,2202 416.1,2202
  region net M2_R: 416,2222 380,2222 380,2271 273,2271 273,2208 416.1,2208

## Silkscreen, mask and mechanical layers (free items; w line width, h text height)
Top Overlay:
  lines w8: 540,25 540,195 ; 450,25 1165,25 1165,195 450,195 450,25
  text "ADC" at 2260,3530.96 h80
  text "S" at 327,3516.89 h80
  text "5V" at 1880.96,3487 h80 r90
  text "5V" at 2908.44,3487 h80 r90
  text "5V" at 3414.7,3487 h80 r90
  text "RX1" at 2826.48,3470.28 h80 r90
  text "RX2" at 3332.74,3470.28 h80 r90
  text "SCL" at 1720.11,3469.46 h80 r90
  text "TX1" at 2748.48,3468.98 h80 r90
  text "TX2" at 3254.74,3468.98 h80 r90
  text "SDA" at 1798.11,3463.28 h80 r90
  text "GND" at 1957.96,3458.51 h80 r90
  text "GND" at 2985.44,3458.51 h80 r90
  text "GND" at 3491.7,3458.51 h80 r90
  text "G" at 321,3419.04 h80
  text "I2C" at 1757,3383.59 h80
  text "UART1" at 2739.48,3384.04 h80
  text "UART2" at 3245.74,3383.63 h80
  text "V" at 323,3315 h80
  text "M1" at 303,3199 h80
  text "M3" at 3547.02,2960.84 h80
  text "E1" at 303,2862.81 h80
  text "DIR" at 3300.24,2830.74 h60
  text "DIR" at 556.72,2829 h60
  text "PWM" at 3277.26,2752 h60
  text "PWM" at 556.72,2750.26 h60
  text "A" at 3350.13,2633.62 h60
  text "A" at 556.72,2631.88 h60
  text "B" at 3355.9,2554.88 h60
  text "B" at 556.72,2553.14 h60
  text "E3" at 3547.02,2467.17 h80
  text "ndt" at 1940,2305.53 h150
  text "M2" at 303,2295.81 h80
  text "M4" at 3547.02,2056.76 h80
  text "E2" at 303,1960.81 h80
  text "DIR" at 3300.24,1928.74 h60
  text "DIR" at 556.72,1927 h60
  text "PWM" at 3277.26,1850 h60
  text "PWM" at 556.72,1848.26 h60
  text "A" at 3350.13,1731.62 h60
  text "A" at 556.72,1729.88 h60
  text "B" at 3355.9,1652.88 h60
  text "B" at 556.72,1651.14 h60
  text "RESET" at 2645,1634.89 h80
  text "E4" at 3547.02,1564.28 h80
  text "BAT" at 3700,1320 h80
  text "1" at 31.77,1270.88 h80
  text "-" at 3543,1153.58 h50
  text "+" at 3543,1075 h50
  text "2" at 30,997.14 h80
  text "5V" at 2714,922.78 h60
  text "3" at 29.81,724.25 h80
  text "JLCJLCJLCJLC" at 620.87,464.87 h39.37
  text "4" at 28,450.99 h80
Bottom Paste:
  region: 3550.98,2242.75 3550.98,2290.75 3520.98,2290.75 3520.98,2242.75
  region: 3550.98,3145.94 3550.98,3193.94 3520.98,3193.94 3520.98,3145.94
  region: 386,2166.81 386,2118.81 416,2118.81 416,2166.81
  region: 386,3070 386,3022 416,3022 416,3070
  region: 3552.98,2202.3 3562.98,2202.3 3562.98,2188.3 3552.98,2188.3
  region: 3552.98,2222.3 3562.98,2222.3 3562.98,2208.3 3552.98,2208.3
  region: 3552.98,3125.49 3562.98,3125.49 3562.98,3111.49 3552.98,3111.49
  region: 3552.98,3105.49 3562.98,3105.49 3562.98,3091.49 3552.98,3091.49
  region: 384,3125.19 374,3125.19 374,3111.19 384,3111.19
  region: 384,3105.19 374,3105.19 374,3091.19 384,3091.19
  region: 384,2202 374,2202 374,2188 384,2188
  region: 384,2222 374,2222 374,2208 384,2208
Top Solder:
  lines w15: 807,3618 828,3618 849,3618 870,3618 891,3618 927,3618 964,3581 1026,3581 1054,3553 1054,3512.22 1060.18,3506.04 1060.18,3457 ; 1000,3652 1000,3647 1079,3568 1079,3523 1085.77,3516.23 1085.77,3457 ; 1100,3652 1100,3643.12 1136.95,3606.17 1136.95,3457 ; 1111.36,3457 1111.36,3595.43 ; 1162.54,3457 1162.54,3606.68 1200,3644.13 1200,3652 ; 1187.95,3595.62 1188.13,3457 ; 1213.72,3457 1213.72,3517.04 1222,3525.31 1222,3569.5 1299.5,3647 1299.5,3652 ; 1239.31,3457 1239.31,3504.86 1248,3513.55 1248,3552 1277,3581 1335.5,3581 1372.5,3618 1408.5,3618 1429.5,3618 1450.5,3618 1471.5,3618 1492.5,3618
Bottom Solder:
  region: 3550.98,2242.75 3550.98,2290.75 3520.98,2290.75 3520.98,2242.75
  region: 3550.98,3145.94 3550.98,3193.94 3520.98,3193.94 3520.98,3145.94
  region: 386,2166.81 386,2118.81 416,2118.81 416,2166.81
  region: 386,3070 386,3022 416,3022 416,3070
  region: 3552.98,2222.3 3562.98,2222.3 3562.98,2208.3 3552.98,2208.3
  region: 3552.98,2202.3 3562.98,2202.3 3562.98,2188.3 3552.98,2188.3
  region: 3552.98,3105.49 3562.98,3105.49 3562.98,3091.49 3552.98,3091.49
  region: 3552.98,3125.49 3562.98,3125.49 3562.98,3111.49 3552.98,3111.49
  region: 384,3105.19 374,3105.19 374,3091.19 384,3091.19
  region: 384,3125.19 374,3125.19 374,3111.19 384,3111.19
  region: 384,2222 374,2222 374,2208 384,2208
  region: 384,2202 374,2202 374,2188 384,2188